# EAGLE board TapuinoMiniDouble (EAGLE 6.6.0)
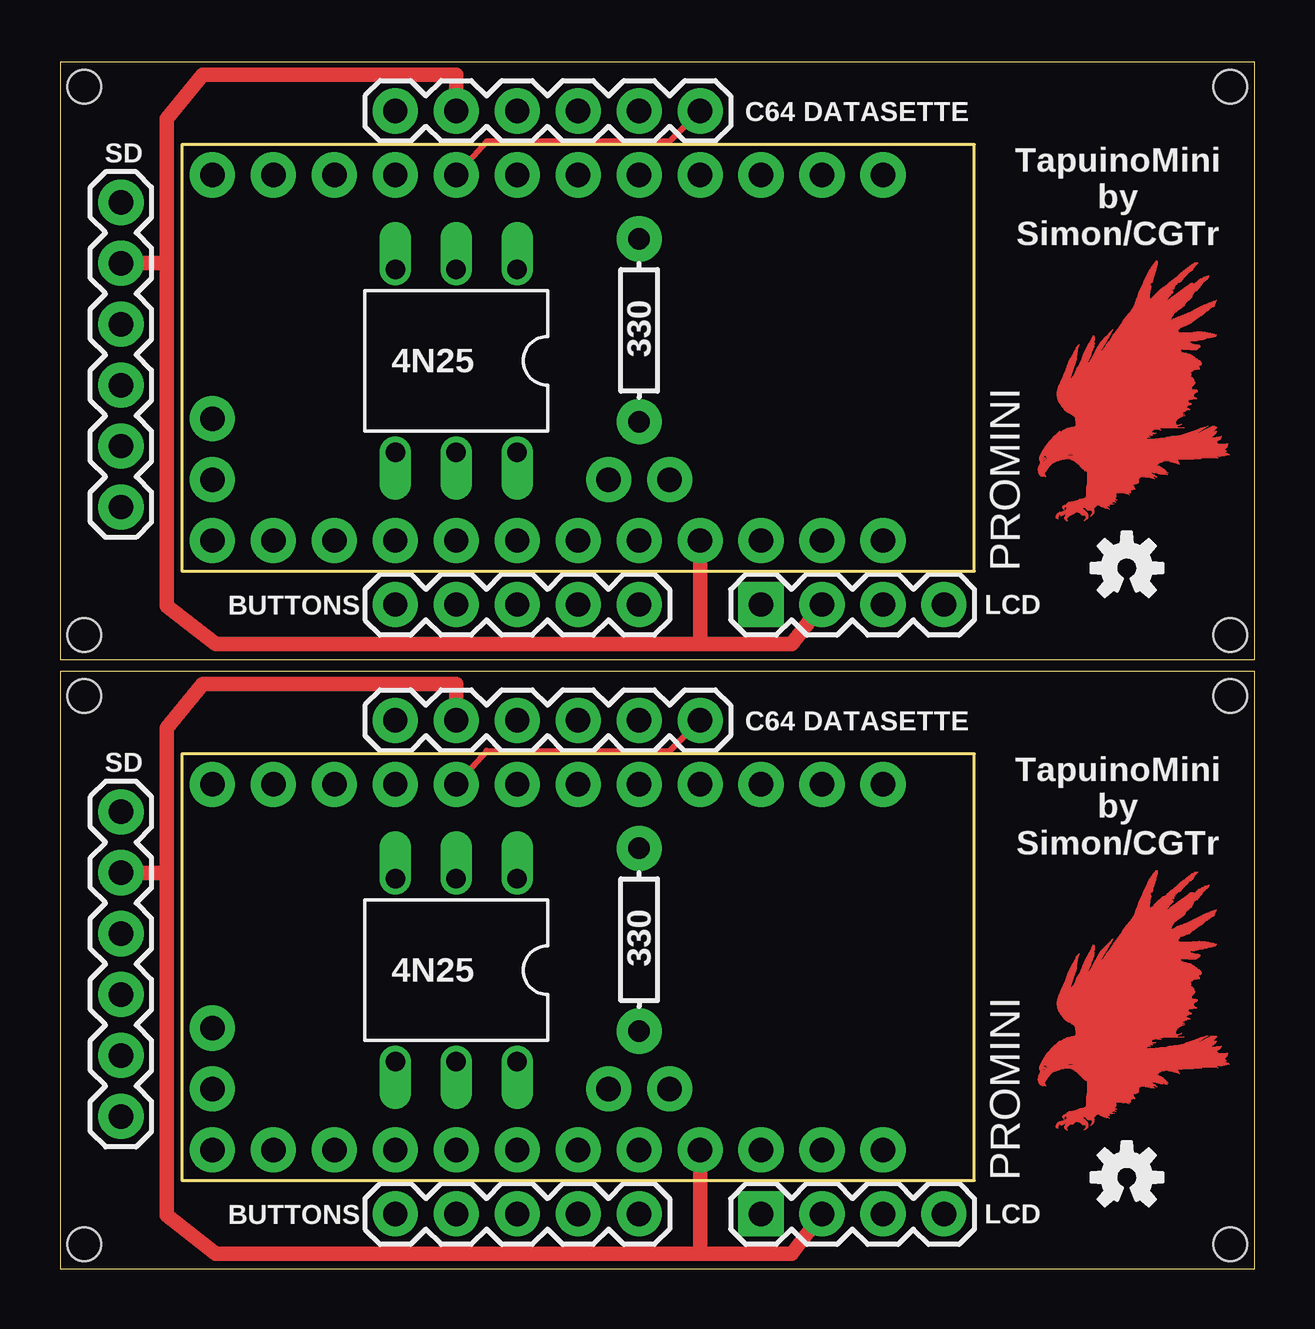
[diagram p0: board, top side]
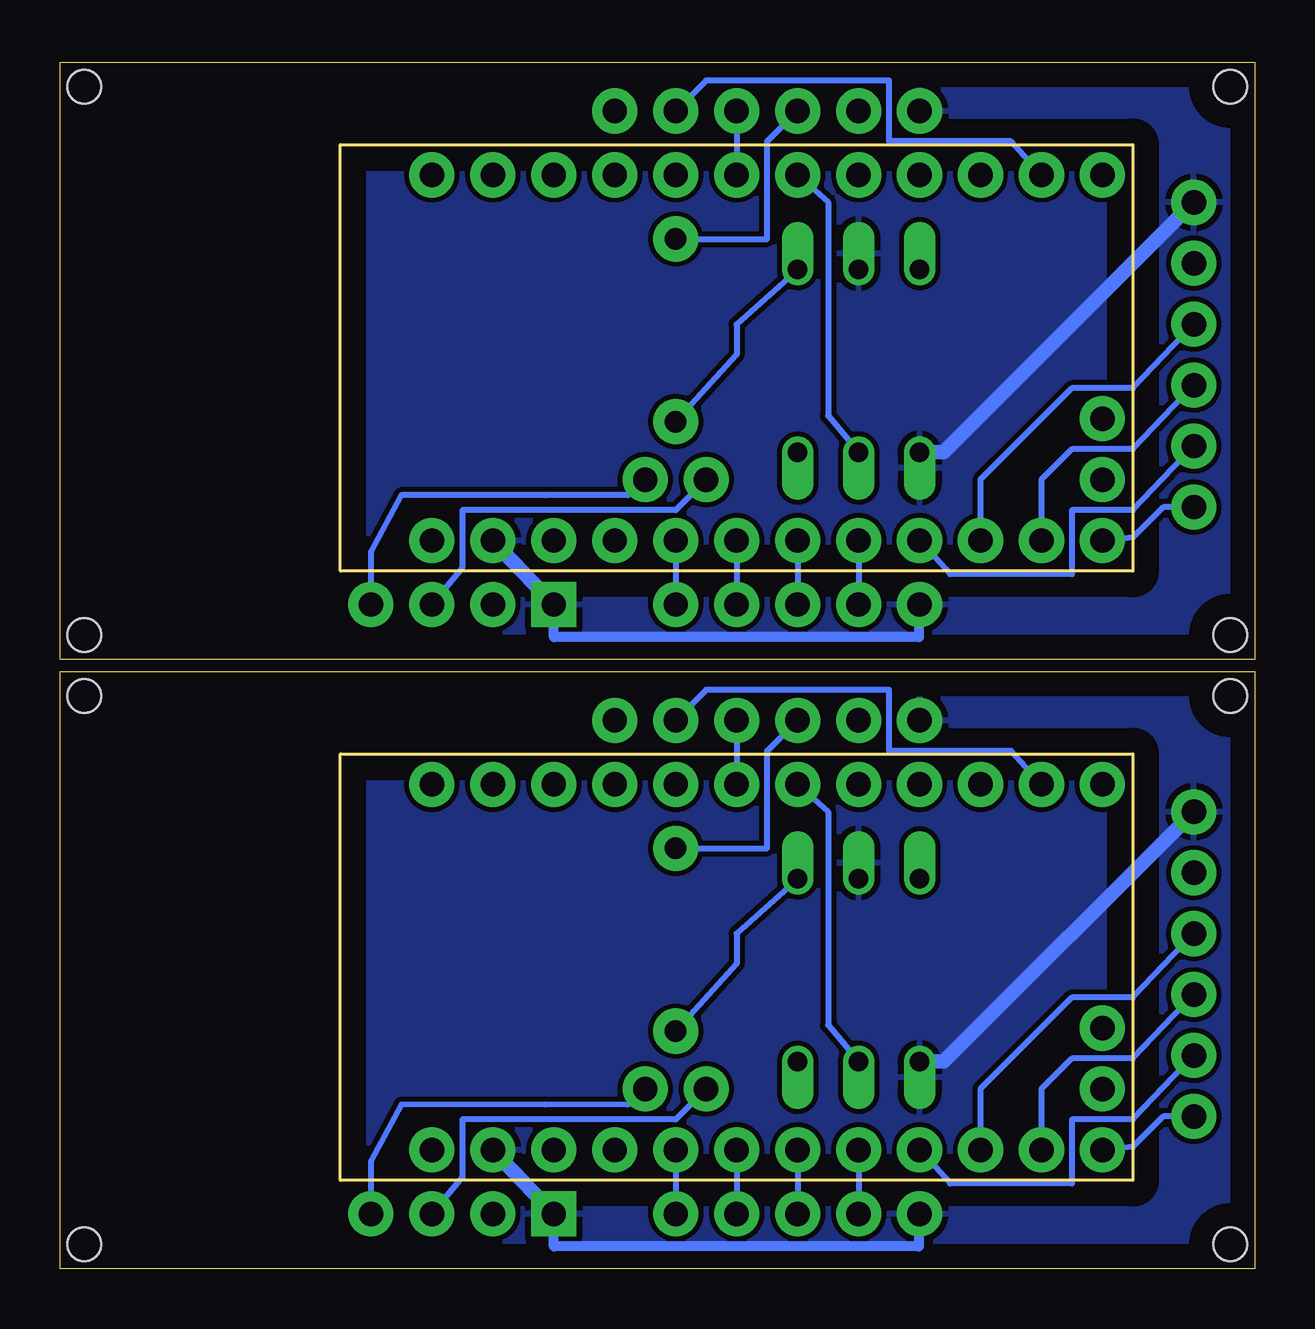
[diagram p1: board, bottom side, seen from below]

Size 49.78 x 50.29 mm. Coordinates in mm from the lower left corner, seen from the top.
Outline: 0,0 49.78,0 49.78,24.89 0,24.89 0,0
Outline: 0,25.4 49.78,25.4 49.78,50.29 0,50.29 0,25.4
Copper layers (1*16): Top 0.035mm / dielectric 1.5mm / Bottom 0.035mm
Design rules "default": minimum track width 10mil, minimum drill 24mil, track to track 8mil, track to pad 8mil, pad to pad 8mil, via to via 8mil, smd to smd 8mil, copper to edge 40mil, drill to drill 8mil, minimum pad ring 10mil, minimum via ring 8mil, stop-mask expansion 4mil, vias tented up to drill 0mil, thermal gap 10mil
Holes 1.4 mm at 1.02,23.88 48.77,23.88 1.02,1.02 48.77,1.02 1.02,49.28 48.77,49.28 1.02,26.42 48.77,26.42

## Footprints (pad centres in the part's own frame; a part is rotated, then mirrored left to right if it is on the bottom)
1X06 = drill 1.016 pad 1.88: 1 0,0; 2 2.54,0; 3 5.08,0; 4 7.62,0; 5 10.16,0; 6 12.7,0
1X05 = drill 1.016 pad 1.88: 1 0,0; 2 2.54,0; 3 5.08,0; 4 7.62,0; 5 10.16,0
1X04 = drill 1.016 pad 1.88 square: 1 0,0 | drill 1.016 pad 1.88: 2 2.54,0; 3 5.08,0; 4 7.62,0
DIL06 = drill 0.813 offset: 1 -2.54,-3.81; 2 0,-3.81; 3 2.54,-3.81; 4 2.54,3.81; 5 0,3.81; 6 -2.54,3.81
PROMINI_A = drill 1.016 pad 1.88: 0/RX 10.16,7.62; 1/TX 12.7,7.62; 2 2.54,7.62; 3* 0,7.62; 4 -2.54,7.62; 5* -5.08,7.62; 6* -7.62,7.62; 7 -10.16,7.62; 8 -12.7,7.62; 9* -15.24,7.62; 10* -15.24,-7.62; 11* -12.7,-7.62; 12 -10.16,-7.62; 13 -7.62,-7.62; A0 -5.08,-7.62; A1 -2.54,-7.62; A2 0,-7.62; A3 2.54,-7.62; A4 1.27,-5.08; A5 3.81,-5.08; A6 -15.24,-2.54; A7 -15.24,-5.08; GND1 10.16,-7.62; GND2 5.08,7.62; RAW 12.7,-7.62; RST1 7.62,-7.62; RST2 7.62,7.62; VCC 5.08,-7.62
AXIAL-0.3 = drill 0.9 pad 1.88: P$1 -3.81,0; P$2 3.81,0

## Placement (x,y rotation side)
JP1  C64 DATASETTE  [1X06]  13.97,22.86 0 top
JP2  SD  [1X06]  2.54,19.05 270 top
JP3  BUTTONS  [1X05]  13.97,2.29 0 top
JP4  LCD  [1X04]  29.21,2.29 0 top
JP5  SD  [1X06]  2.54,44.45 270 top
JP6  BUTTONS  [1X05]  13.97,27.69 0 top
JP7  LCD  [1X04]  29.21,27.69 0 top
JP8  C64 DATASETTE  [1X06]  13.97,48.26 0 top
OK1  4N25  [DIL06]  16.51,12.45 180 top
OK2  4N25  [DIL06]  16.51,37.85 180 top
PROMINI  PROMINI_A  [PROMINI_A]  21.59,12.57 0 top
PROMINI1  PROMINI_A  [PROMINI_A]  21.59,37.97 0 top
R1  330  [AXIAL-0.3]  24.13,13.72 90 top
R2  330  [AXIAL-0.3]  24.13,39.12 90 top
U$1  [EAGLE-TOP-8MM]  40.76,31.16 0 top
U$2  [EAGLE-TOP-8MM]  40.76,5.76 0 top
U$3  [OSHW-LOGO-S]  44.45,3.81 0 top
U$4  [OSHW-LOGO-S]  44.45,29.21 0 top

## Library data of the parts
JP1 JP2 JP5 JP8 = SparkFun-Connectors; PROD_ID: CONN-08437
JP3 JP4 JP6 JP7 = SparkFun-Connectors
OK1 OK2 = optocoupler; MF: FAIRCHILD SEMICONDUCTOR; MPN: 4N35; OC_FARNELL: 1328375; OC_NEWARK: 72K9946
PROMINI PROMINI1 = arduino
R1 R2 = SparkFun-Passives
U$1 U$2 = logo
U$3 U$4 = SparkFun-Aesthetics

## Nets
GND: JP1.1 JP2.1 JP3.1 JP4.1 OK1.2 OK1.4 PROMINI.GND1
GND1: JP5.1 JP6.1 JP7.1 JP8.1 OK2.2 OK2.4 PROMINI1.GND1
N$1: JP3.5 PROMINI.A3
N$2: JP3.4 PROMINI.A2
N$3: JP3.3 PROMINI.A1
N$4: JP3.2 PROMINI.A0
N$5: JP2.3 PROMINI.12
N$6: JP2.4 PROMINI.11*
N$7: JP2.6 PROMINI.10*
N$8: JP2.5 PROMINI.13
N$9: JP4.4 PROMINI.A5
N$10: JP4.3 PROMINI.A4
N$11: JP1.3 R1.P$2
N$12: OK1.1 R1.P$1
N$13: JP1.4 PROMINI.3*
N$14: OK1.5 PROMINI.4
N$15: JP1.5 PROMINI.8
N$16: JP1.6 PROMINI.5*
N$17: JP6.5 PROMINI1.A3
N$18: JP6.4 PROMINI1.A2
N$19: JP6.3 PROMINI1.A1
N$20: JP6.2 PROMINI1.A0
N$21: JP5.3 PROMINI1.12
N$22: JP5.4 PROMINI1.11*
N$23: JP5.6 PROMINI1.10*
N$24: JP5.5 PROMINI1.13
N$25: JP7.4 PROMINI1.A5
N$26: JP7.3 PROMINI1.A4
N$27: JP8.3 R2.P$2
N$28: OK2.1 R2.P$1
N$29: OK2.5 PROMINI1.4
N$30: JP8.4 PROMINI1.3*
N$31: JP8.5 PROMINI1.8
N$32: JP8.6 PROMINI1.5*
VCC: JP1.2 JP2.2 JP4.2 PROMINI.VCC
VCC1: JP5.2 JP7.2 JP8.2 PROMINI1.VCC

## Tracks (layer width: path | path; a pad name or v marks a point on that pad's centre or on a via)
GND
  Bottom 0.254: 13.97,8.89 OK1.4
  Bottom 0.406: JP3.1 14,2.29 14,0.93 29.21,0.93 JP4.1
  Bottom 0.61: JP4.1 PROMINI.GND1 | OK1.4 12.95,8.64 JP2.1
  pour Bottom: 0,24.89 0,0 49.78,0 49.78,24.89
GND1
  Bottom 0.254: 13.97,34.29 OK2.4
  Bottom 0.406: JP6.1 14,27.69 14,26.33 29.21,26.33 JP7.1
  Bottom 0.61: JP7.1 PROMINI1.GND1 | OK2.4 12.95,34.04 JP5.1
  pour Bottom: 0,50.29 0,25.4 49.78,25.4 49.78,50.29
N$1
  Bottom 0.254: PROMINI.A3 JP3.5
N$2
  Bottom 0.254: PROMINI.A2 JP3.4
N$3
  Bottom 0.254: PROMINI.A1 JP3.3
N$4
  Bottom 0.254: PROMINI.A0 JP3.2
N$5
  Bottom 0.254: JP2.3 5.08,11.3 7.62,11.3 11.43,7.49 PROMINI.12
N$6
  Bottom 0.254: JP2.4 5.08,8.76 7.62,8.76 8.89,7.49 PROMINI.11*
N$7
  Bottom 0.254: JP2.6 3.81,6.35 5.08,5.08 PROMINI.10*
N$8
  Bottom 0.254: JP2.5 5.08,6.22 7.62,6.22 7.62,3.56 12.7,3.56 PROMINI.13
N$9
  Bottom 0.254: PROMINI.A5 26.14,6.84 29.56,6.84 35.56,6.84 36.83,4.48 JP4.4
N$10
  Bottom 0.254: PROMINI.A4 24.13,6.22 33.02,6.22 33.02,3.81 JP4.3
N$11
  Bottom 0.254: R1.P$2 20.32,17.53 20.32,21.59 JP1.3
N$12
  Bottom 0.254: OK1.1 21.59,13.97 21.59,12.7 R1.P$1
N$13
  Bottom 0.254: JP1.4 PROMINI.3*
N$14
  Bottom 0.254: PROMINI.4 17.78,19.05 17.78,10.16 OK1.5
N$15
  Bottom 0.254: PROMINI.8 10.16,21.59 15.24,21.59 15.24,24.13 22.86,24.13 JP1.5
N$16
  Top 0.254: PROMINI.5* 17.78,21.59 25.4,21.59 JP1.6
N$17
  Bottom 0.254: PROMINI1.A3 JP6.5
N$18
  Bottom 0.254: PROMINI1.A2 JP6.4
N$19
  Bottom 0.254: PROMINI1.A1 JP6.3
N$20
  Bottom 0.254: PROMINI1.A0 JP6.2
N$21
  Bottom 0.254: JP5.3 5.08,36.7 7.62,36.7 11.43,32.89 PROMINI1.12
N$22
  Bottom 0.254: JP5.4 5.08,34.16 7.62,34.16 8.89,32.89 PROMINI1.11*
N$23
  Bottom 0.254: JP5.6 3.81,31.75 5.08,30.48 PROMINI1.10*
N$24
  Bottom 0.254: JP5.5 5.08,31.62 7.62,31.62 7.62,28.96 12.7,28.96 PROMINI1.13
N$25
  Bottom 0.254: PROMINI1.A5 26.14,32.24 29.56,32.24 35.56,32.24 36.83,29.88 JP7.4
N$26
  Bottom 0.254: PROMINI1.A4 24.13,31.62 33.02,31.62 33.02,29.21 JP7.3
N$27
  Bottom 0.254: R2.P$2 20.32,42.93 20.32,46.99 JP8.3
N$28
  Bottom 0.254: OK2.1 21.59,39.37 21.59,38.1 R2.P$1
N$29
  Bottom 0.254: PROMINI1.4 17.78,44.45 17.78,35.56 OK2.5
N$30
  Bottom 0.254: JP8.4 PROMINI1.3*
N$31
  Bottom 0.254: PROMINI1.8 10.16,46.99 15.24,46.99 15.24,49.53 22.86,49.53 JP8.5
N$32
  Top 0.254: PROMINI1.5* 17.78,46.99 25.4,46.99 JP8.6
VCC
  Top 0.61: 4.45,16.51 JP2.2 | 4.45,16.51 4.45,22.54 5.96,24.38 16.51,24.38 JP1.2 | JP4.2 30.48,0.64 26.67,0.64 | 4.45,16.51 4.45,2.23 6.49,0.64 26.67,0.64 | PROMINI.VCC 26.67,0.64
VCC1
  Top 0.61: 4.45,41.91 JP5.2 | 4.45,41.91 4.45,47.94 5.96,49.78 16.51,49.78 JP8.2 | JP7.2 30.48,26.04 26.67,26.04 | 4.45,41.91 4.45,27.63 6.49,26.04 26.67,26.04 | PROMINI1.VCC 26.67,26.04

## Text on the board
tNames: TapuinoMini / by / Simon/CGTr | TapuinoMini / by / Simon/CGTr